# Altium PCB Placa-Mae-PCB1.PcbDoc
Units mm, origin at the board's own origin, x right, y up, seen from the top; angles counter-clockwise.
Board outline 87 x 113 mm, 2 copper layers (Top Layer, Bottom Layer); 35 components, 32 nets, 161 pads, 0 vias.
Unrouted connection lines stored in the file: 13.
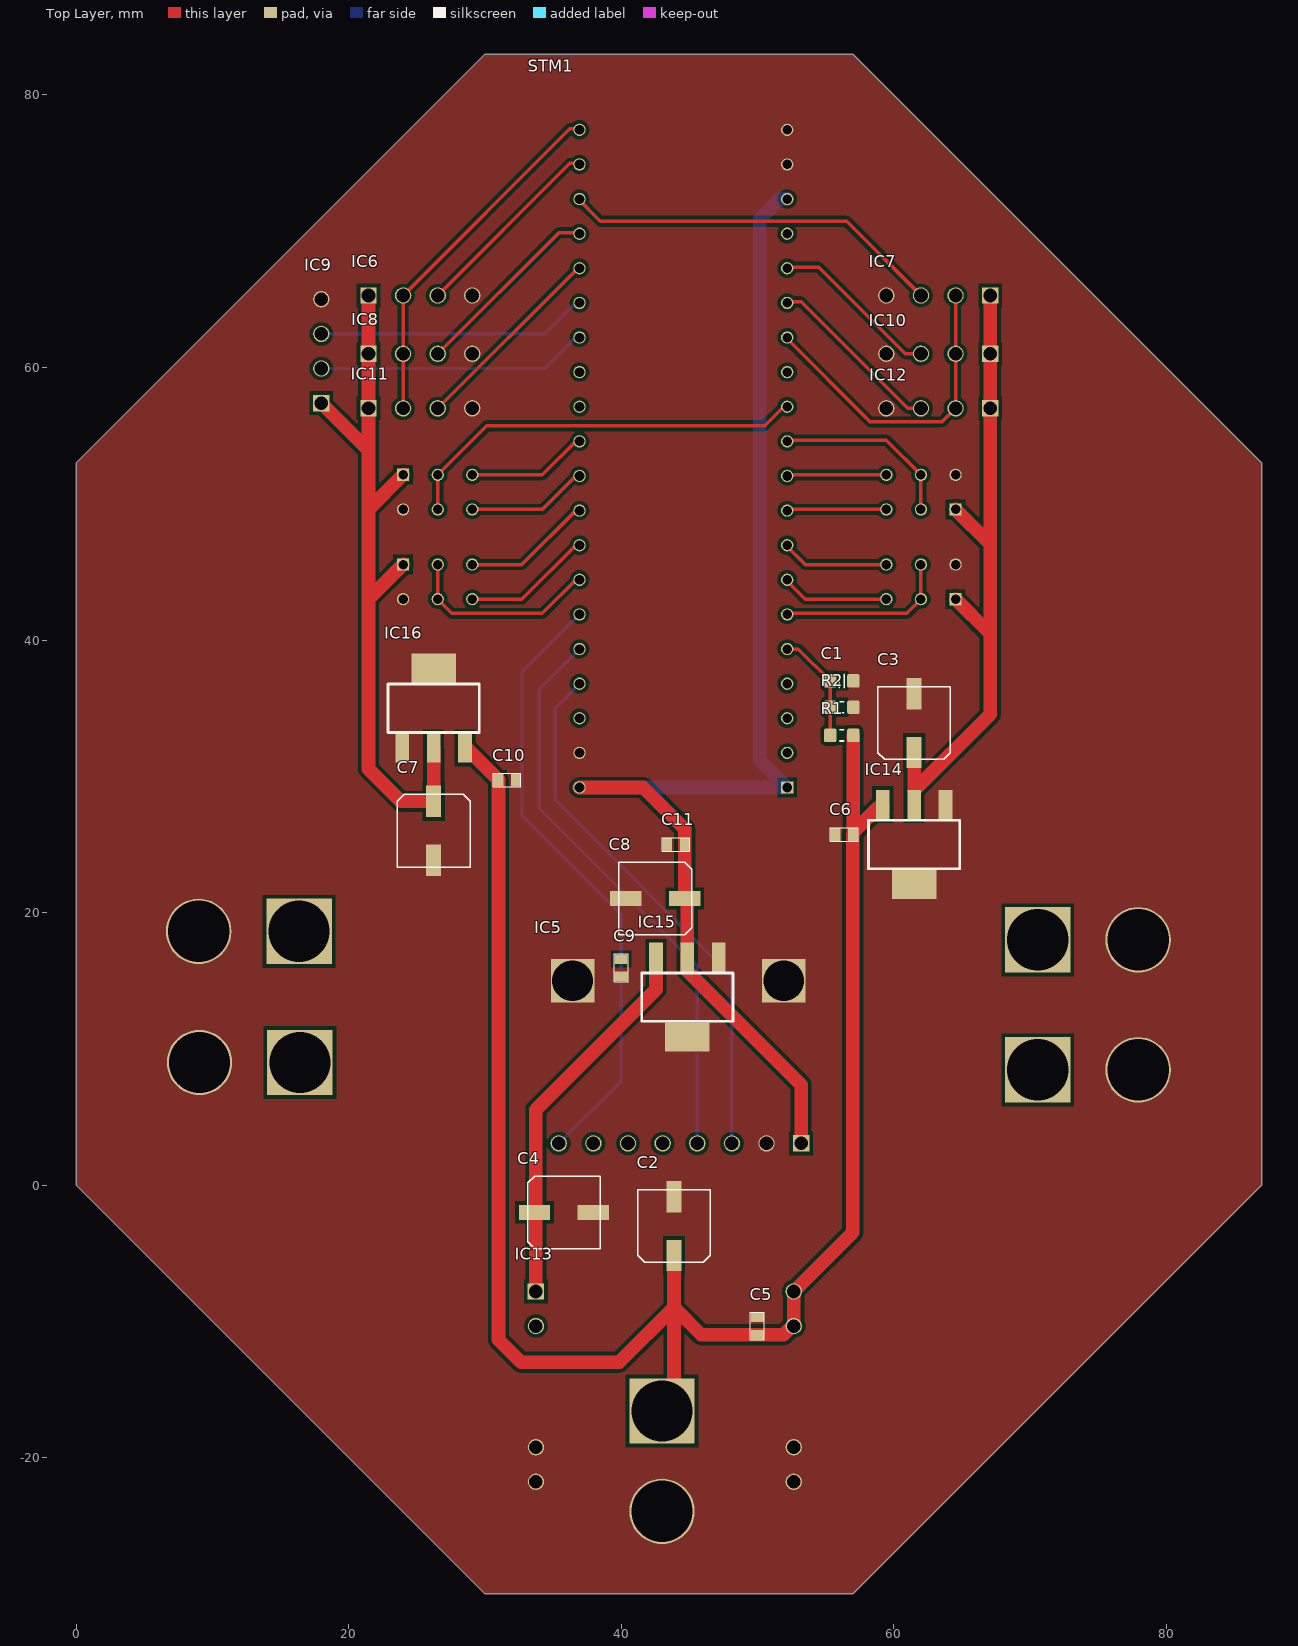
[diagram p0: Top Layer view]
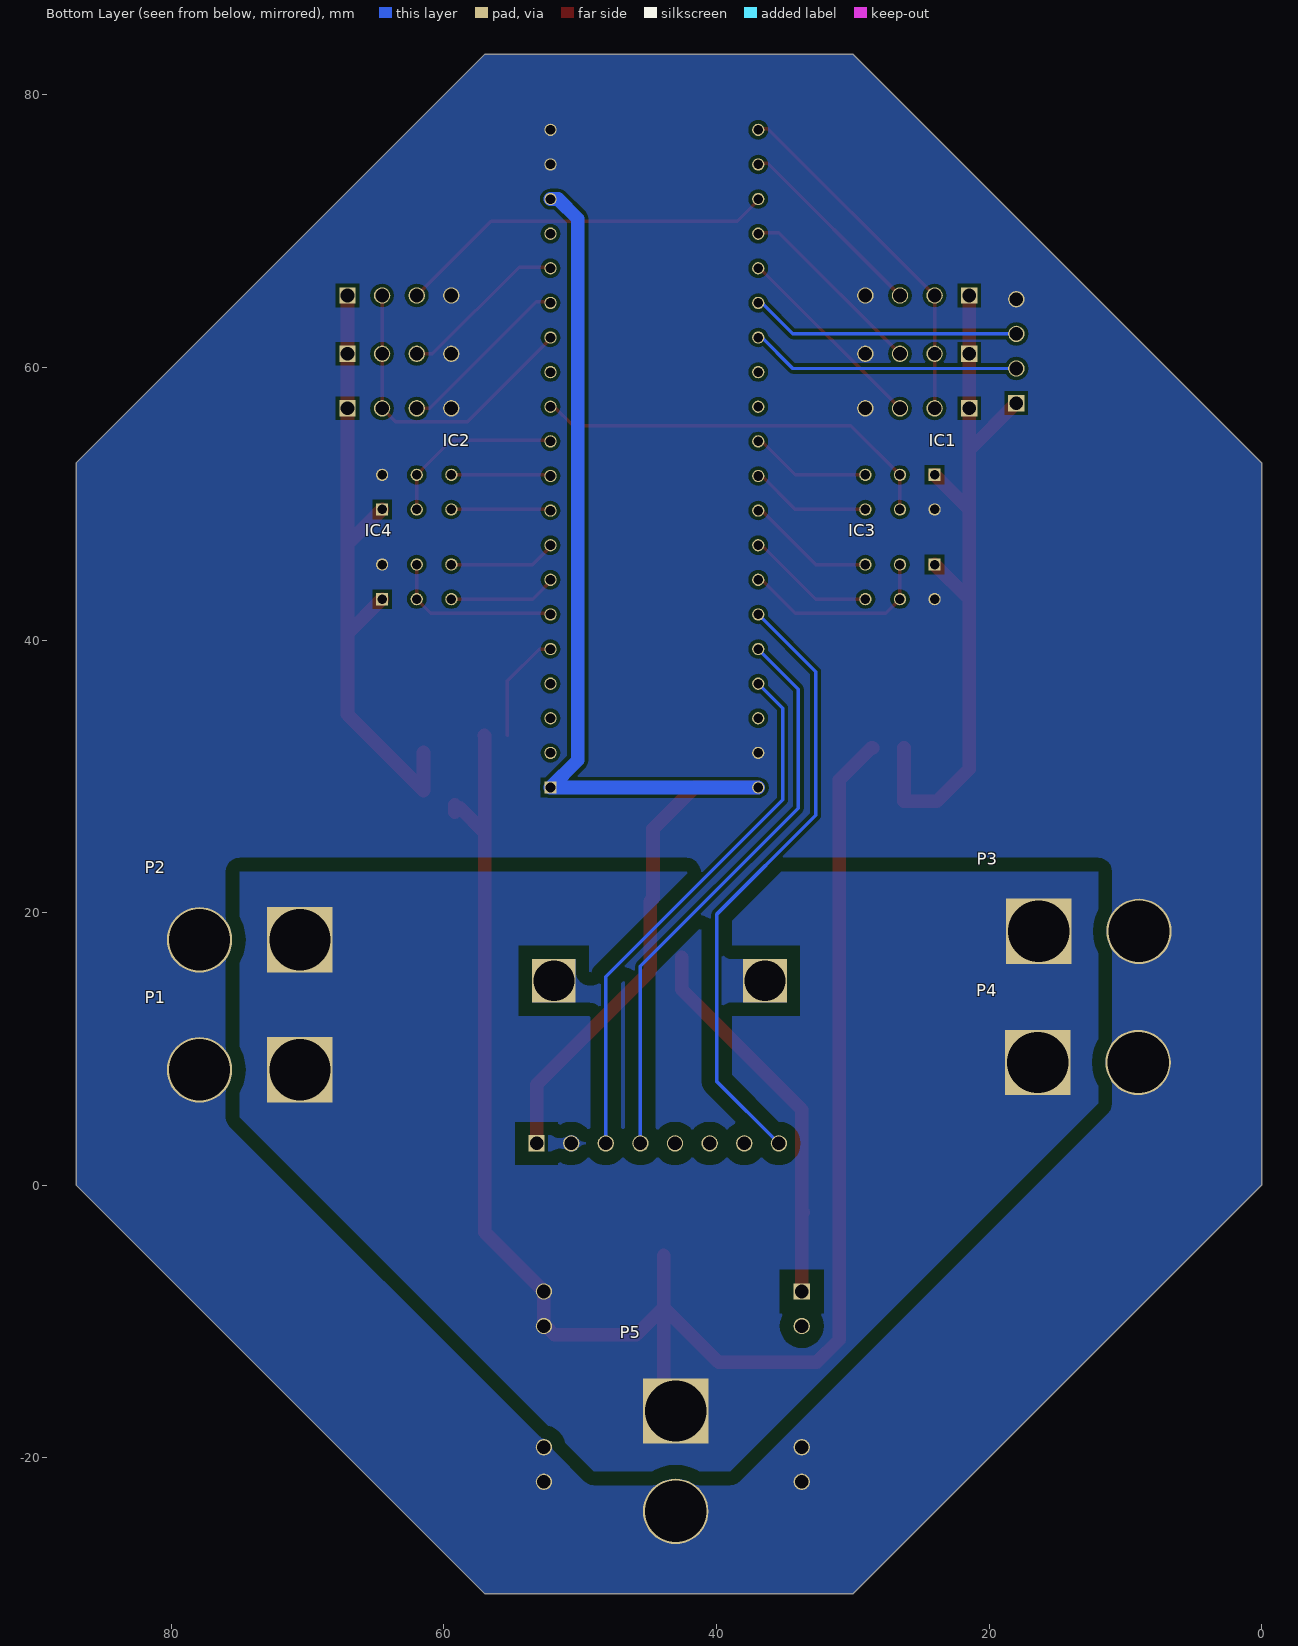
[diagram p1: Bottom Layer view, seen from below]
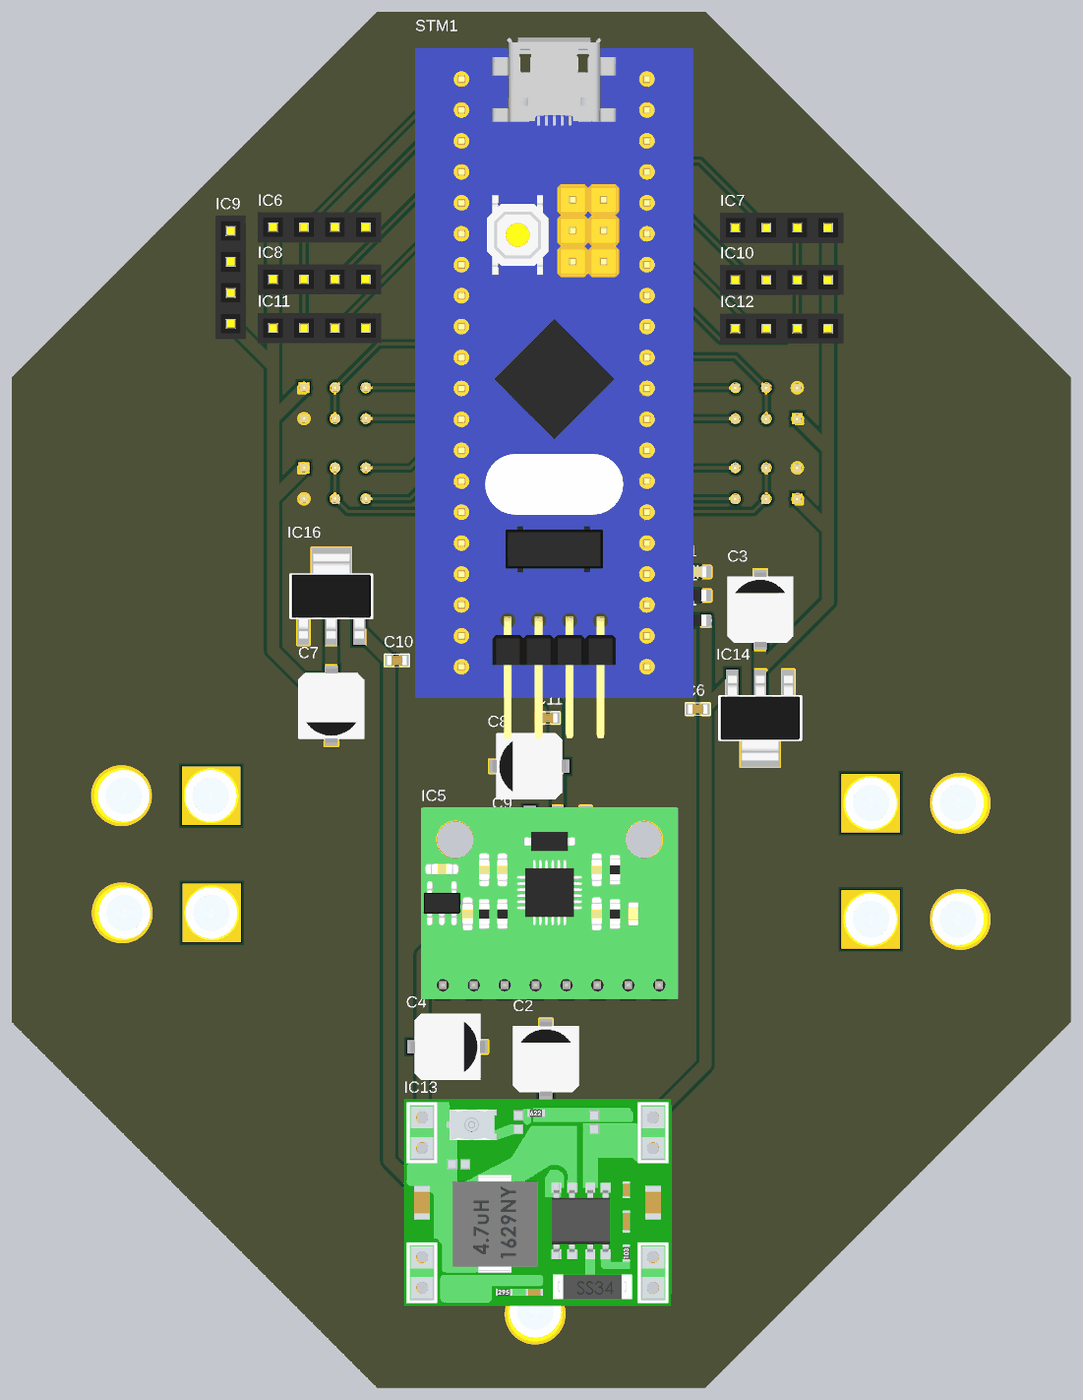
[diagram p2: 3D render of the assembled board from above, using the file's embedded part models]
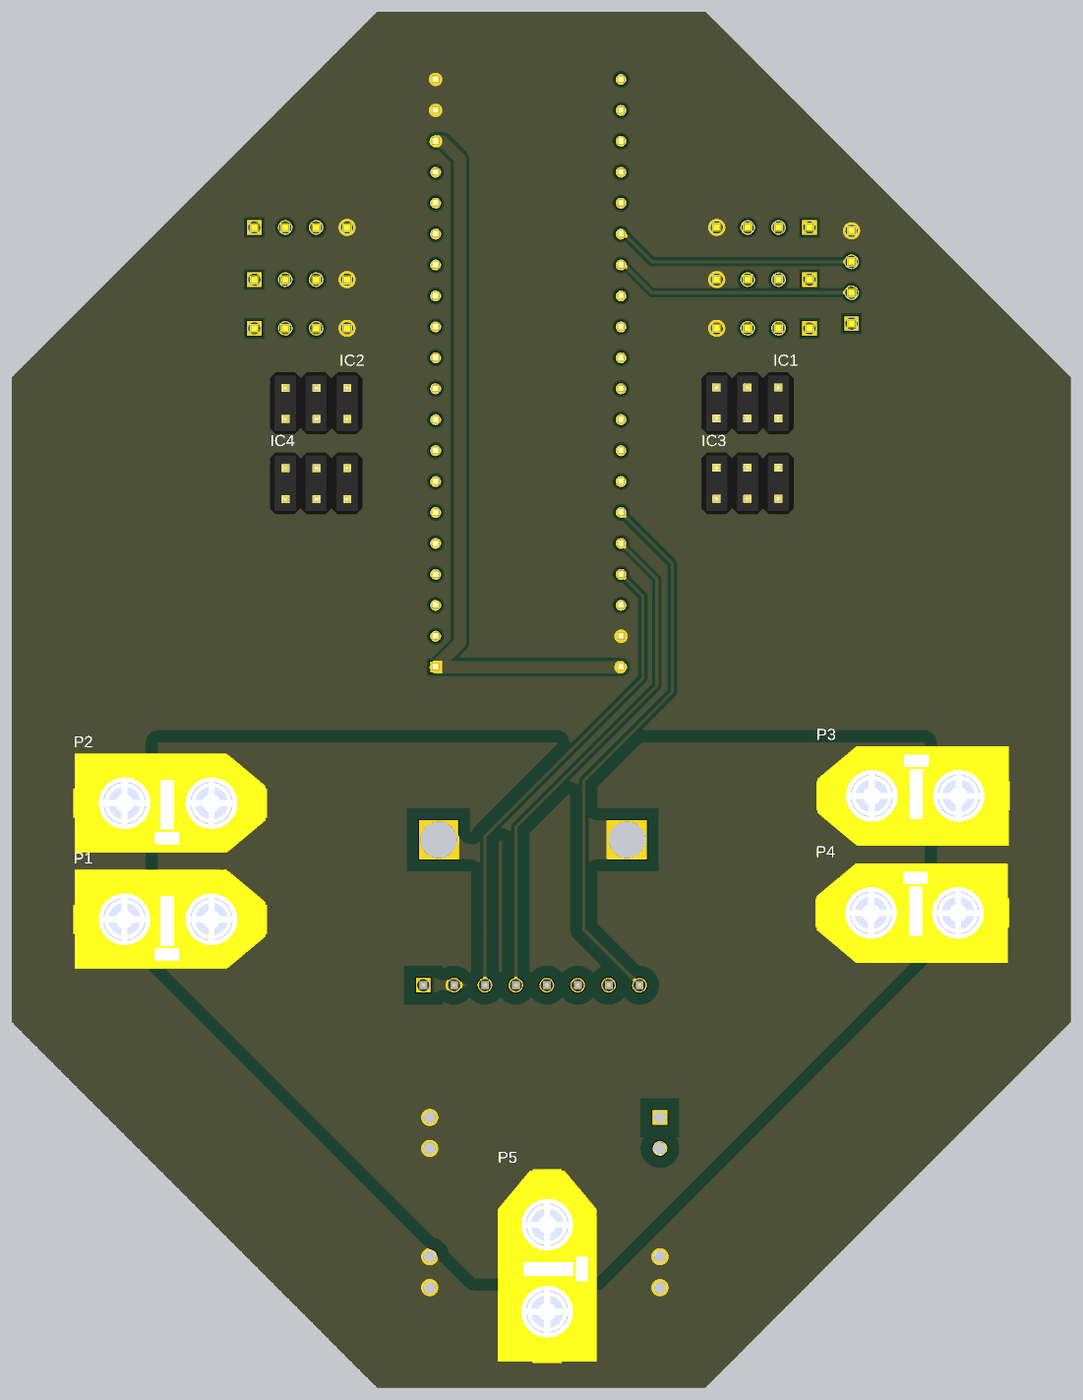
[diagram p3: 3D render of the assembled board from below, using the file's embedded part models]

## Layer stack, top to bottom
Top Solder: solder mask 0.0102, Solder Resist, Dk 3.5
Top Layer: signal copper 0.0356
Dielectric 1: dielectric 0.32, FR-4, Dk 4.8
Bottom Layer: signal copper 0.0356
Bottom Solder: solder mask 0.0102, Solder Resist, Dk 3.5

## Board outline
30,-30 0,0 0,5 0,53 30,83 57,83 87,53 87,5 87,1 87,0 57,-30 53,-30 35,-30

## Design rules (kind name [scope] priority, off if disabled: settings)
Clearance POWER_Clearance [InNet('+12') And OnLayer('Bottom Layer')] p1: gap=1 ignorepadtopadclearanceinfootprint=FALSE
Clearance [All] p2: gap=0.254 ignorepadtopadclearanceinfootprint=FALSE except(0: Arc-Hole Track-Hole SMDPad-Hole THPad-Hole Via-Hole Fill-Hole Poly-Hole Region-Hole Text-Hole)
PlaneConnect [All] p1: planeconnectstyle=Direct reliefexpansion=0.508 reliefentries=4 reliefconductorwidth=0.254 reliefairgap=0.254
PolygonConnect [All] p1: connectstyle=Direct reliefconductorwidth=0.254 reliefentries=4 polygonreliefangle="90 Angle" airgapwidth=0.254
RoutingVias [All] p1: holewidth=0.711 width=1.27 viastyle="Through Hole" minholewidth=0.711 minwidth=1.27 maxholewidth=0.711 maxwidth=1.27
SolderMaskExpansion [All] p1: expansion=0.102
Width [All] p1: maxlimit=1 minlimit=0.254 preferedwidth=0.254
29 further rules are at their usual default settings.

## Classes and differential pairs
polygon class POWER: VBAT_BOT
component class Power: C3 C4 C5 C6 C7 C8 C9 C10 C11 IC13 IC14 IC15 IC16
component class Placa-Mae-Sch1: C1 C2 IC1 IC2 IC3 IC4 IC5 IC6 IC7 IC8 IC9 IC10 IC11 IC12 P1 P2 P3 P4 P5 R1 R2 STM1

## Components (designator, comment, footprint, x,y, rotation, side; value= is the part's Value field where it differs from the comment)
C1 "1µF" CAPC1608X90N 56.191,37 r0 top
C2 "10uF" "CAP ALUM 5X5" 43.878,-3 r90 top
C3 "10uF" "CAP ALUM 5X5" 61.498,33.902 r90 top
C4 "10uF" "CAP ALUM 5X5" 35.807,-2 r0 top
C5 "100nF" "CAP CER 0603" 50,-10.341 r270 top
C6 "100nF" "CAP CER 0603" 56.365,25.729 r0 top
C7 "10uF" "CAP ALUM 5X5" 26.246,26 r270 top
C8 "10uF" "CAP ALUM 5X5" 42.507,21.035 r180 top
C9 "100nF" "CAP CER 0603" 40,15.956 r90 top
C10 "100nF" "CAP CER 0603" 31.635,29.73 r180 top
C11 "100nF" "CAP CER 0603" 44.031,25 r0 top
IC1 "BTS7960-Sinais" "HEADER 3X2 M" 24,52.12 r0 bottom
IC2 "BTS7960-Sinais" "HEADER 3X2 M" 64.54,49.58 r180 bottom
IC3 "BTS7960-Sinais" "HEADER 3X2 M" 24,45.54 r0 bottom
IC4 "BTS7960-Sinais" "HEADER 3X2 M" 64.54,43 r180 bottom
IC5 "MPU6050-IMU" MPU6050-IMU 53.206,3.062 r180 top
IC6 "HC-SR04" "HEADER 1X4 F" 25.651,63.883 r270 top
IC7 "HC-SR04" "HEADER 1X4 F" 62.889,66.677 r90 top
IC8 "HC-SR04" "HEADER 1X4 F" 25.651,59.603 r270 top
IC9 "HC-SR04" "HEADER 1X4 F" 19.397,61.575 r0 top
IC10 "HC-SR04" "HEADER 1X4 F" 62.889,62.397 r90 top
IC11 "HC-SR04" "HEADER 1X4 F" 25.651,55.603 r270 top
IC12 "HC-SR04" "HEADER 1X4 F" 62.889,58.397 r90 top
IC13 "MP1584" MP1584 42,-14.278 r0 top
IC14 "AMS1117" SOT-223 61.498,25 r270 top
IC15 "LD1117S33CTR" SOT-223 44.859,13.795 r270 top
IC16 "AMS1117" SOT-223 26.246,35 r90 top
P1 "HEADER-BTS7960-POT" XT60-MALE 74,8.46 r0 bottom
P2 "HEADER-BTS7960-POT" XT60-MALE 74,18 r0 bottom
P3 "HEADER-BTS7960-POT" XT60-MALE 12.937,18.62 r180 bottom
P4 "HEADER-BTS7960-POT" XT60-MALE 13,9 r180 bottom
P5 "HEADER-BAT" XT60-MALE 43,-20 r270 bottom
R1 "10k" RESC1608X55N 56.191,33.002 r0 top
R2 "3k6" RESC1608X55N 56.191,35.061 r180 top
STM1 "BLUEPILL STM32F103" STM32-BLUEPILL 52.184,29.177 r90 top

## Footprints (in the part's own frame and the unit in brackets; to place one, negate y for a bottom-side part, rotate by r counter-clockwise, add the part's x,y. Pads: shape width x height; smd on the part's side, far side on the other; paste and mask are expansions set on the pad)
"CAP ALUM 5X5" [mm]
  rect 2.3x1.1 smd: 1(-2.159,0) 2(2.159,0)
  silkscreen extent -2.67,-2.67 2.67,2.67, body extent -3.05,-2.67 3.05,2.67, height 5.52
"CAP CER 0603" [mm]
  rect 0.7x0.95 smd: 1(-0.635,0) 2(0.635,0)
  silkscreen extent -1.02,-0.51 1.02,0.51, body extent -0.8,-0.4 0.8,0.4, height 0.9
CAPC1608X90N [mm] "Chip Capacitor, Body 1.6x0.8mm, EIA 0603, IPC Medium Density"
  round 0.254 on Mech15: 0(0,0)
  rrect25% 0.9x1 smd: 1(-0.85,0) 2(0.85,0)
  Top Layer pour cut-out: -0.6,0.5 -0.4,0.7 0.4,0.7 0.6,0.5 0.6,-0.5 0.4,-0.7 -0.4,-0.7 -0.6,-0.5
  silkscreen extent -0.18,-0.48 0.18,0.48, body extent -0.85,-0.45 0.85,0.45, height 0.89
"HEADER 1X4 F" [mm]
  rect 1.2x1.2 hole 1: 1(-1.397,-4.191)
  round 1.2 hole 1: 2(-1.397,-1.651) 3(-1.397,0.889) 4(-1.397,3.429)
  body extent -2.67,-5.46 -0.17,4.7, height 8.4
"HEADER 3X2 M" [mm]
  rect 0.9x0.9 hole 0.7: 1(0,0)
  round 0.9 hole 0.7: 2(2.54,0) 3(5.08,0) 4(5.08,2.54) 5(2.54,2.54) 6(0,2.54)
  body extent -1.27,-1.27 6.35,3.81, height 9.2
MP1584 [mm]
  round 1.2 hole 1: 1(-8.255,3.937) 2(10.668,3.937) 2(10.668,6.477) 3(-8.255,-7.493) 3(-8.255,-4.953) 4(10.668,-7.493) 4(10.668,-4.953)
  rect 1.2x1.2 hole 1: 1(-8.255,6.477)
  body extent -9.81,-9.02 12.19,7.98, height 14.1
MPU6050-IMU [mm]
  rect 1.2x1.2 hole 1: 1(0,0)
  rect 3.2x3.2 hole 3: 2(1.27,-11.938) 2(16.764,-11.938)
  round 1.2 hole 1: 2(2.54,0) 3(5.08,0) 4(7.62,0) 5(10.16,0) 6(12.7,0) 7(15.24,0) 8(17.78,0)
  body extent -1.54,-14.6 19.57,1.27, height 10.94
RESC1608X55N [mm] "Chip Resistor, Body 1.6x0.8mm, EIA 0603, IPC Medium Density"
  round 0.254 on Mech15: 0(0,0)
  rrect25% 0.9x1 smd: 1(-0.85,0) 2(0.85,0)
  Top Layer pour cut-out: -0.6,0.5 -0.4,0.7 0.4,0.7 0.6,0.5 0.6,-0.5 0.4,-0.7 -0.4,-0.7 -0.6,-0.5
  silkscreen extent -0.15,-0.41 0.15,0.41, body extent -0.87,-0.47 0.88,0.48, height 0.54
SOT-223 [mm]
  rect 2.15x1 smd: 1(-2.925,2.3) 2(-2.925,0) 3(-2.925,-2.3)
  rect 2.15x3.25 smd: 4(2.925,0)
  silkscreen extent -1.78,-3.35 1.78,3.35, body extent -3.48,-3.25 3.48,3.25, height 1.65
STM32-BLUEPILL [mm]
  rect 0.9x0.9 hole 0.7: 1(0,0)
  round 0.9 hole 0.7: 2(2.54,0) 3(5.08,0) 4(7.62,0) 5(10.16,0) 6(12.7,0) 7(15.24,0) 8(17.78,0) 9(20.32,0) 10(22.86,0) 11(25.4,0) 12(27.94,0) 13(30.48,0) 14(33.02,0) 15(35.56,0) 16(38.1,0) 17(40.64,0) 18(43.18,0) 19(45.72,0) 20(48.26,0) 21(48.26,15.24) 22(45.72,15.24) 23(43.18,15.24) 24(40.64,15.24) 25(38.1,15.24) 26(35.56,15.24) 27(33.02,15.24) 28(30.48,15.24) 29(27.94,15.24) 30(25.4,15.24) 31(22.86,15.24) 32(20.32,15.24) 33(17.78,15.24) 34(15.24,15.24) 35(12.7,15.24) 36(10.16,15.24) 37(7.62,15.24) 38(5.08,15.24) 39(2.54,15.24) 40(0,15.24)
  body extent -5.84,-3.81 51.72,19.05, height 14.85
XT60-MALE [mm]
  rect 4.8x4.8 hole 4.5: 1(-3.429,0)
  round 4.8 hole 4.5: 2(3.937,0)
  body extent -7.95,-4.09 7.95,4.06, height 16.2

## Part data
C1: library part GCJ188R71C104KA01D, "CAP CER 0.1UF 16V X7R 0603", Digi-Key Part Number=490-5796-1-ND, Manufacturer="Murata Electronics North America", Operating Temperature="-55°C ~ 125°C", Package / Case="0603 (1608 Metric)", Ratings=AEC-Q200, Temperature Coefficient=X7R, Tolerance=±10%, Voltage=16V, @ qty=0, Applications="Automotive, Boardflex Sensitive", Datasheets=http://www.murata.com/~/media/webrenewal/support/library/catalog/products/capacitor/mlcc/c03e.ashx, Factory Stock=0, Features="Soft Termination", Height - Seated (Max)=-, Image=//media.digikey.com/Renders/Murata%20Renders/0603%28LQG18%29.jpg, Lead Spacing=-, Lead Style=-, Minimum Quantity=1, Mounting Type="Surface Mount, MLCC", Packaging="Cut Tape (CT)", Part Number=GCJ188R71C104KA01D, Part Status=Active, Quantity Available=22473, Series=GCJ, Size / Dimension="0.063\" L x 0.031\" W (1.60mm x 0.80mm)", Thickness (Max)="0.035\" (0.90mm)", Unit Price (USD)=0.21
C2 C3 C4 C7 C8: library part "CAP ALUM 25V 10uF", "Aluminum Electrolytic Capacitors - SMD 25volts 10uF 5x5.4 20%", Mfr=Nichion, Mfr Nr=UWX1E100MCL1GB, Voltage Rating=25V, Dimensions=5x5mm, Series=UWX, Type="Surface Mount Aluminum Electrolytic Capacitor"
C5 C6 C9 C10 C11: library part "CAP CER 0603 25V 100nF", "Multilayer Ceramic Capacitors MLCC - SMD/SMT 25V 0.1uF 0603 Y5V -20/+80%", Mfr=KEMET, Mfr Nr=C0603C104Z3VACTU, Voltage Rating=25V, Dimensions="0603 (1608 metric)", Series="SMD Comm Y5V", Type="Ceramic Capacitor"
IC1 IC2 IC3 IC4: "Conector com os sinais de controle de velocidade do driver BTS7960"
IC6 IC7 IC8 IC9 IC10 IC11 IC12: "Sensor Ultrassom"
IC14 IC16: "LDO Voltage Regulators 5V 1A", Mfr=STMicroelectronics, Package=SOT-223-3, Series=LD1117
IC15: "LDO Voltage Regulators 3.3V 0.8A Positive", Mfr=STMicroelectronics, Package=SOT-223-3, Series=LD1117
R1 R2: library part "RES 1K 0402", "RES SMD 20 OHM 1% 1/16W 0603"
STM1: library part STM32-BLUEPILL, "STM32 Blue Pill Development Module"

## Nets (pads, with @x,y where several pads share a name; then routed paths per layer and width w, separated by ;. In a path a pad name is that pad's centre, name@x,y a point inside that pad or via, vN(x,y) a via of type N, cw(c..) or ccw(c..) an arc to the next point about the centre after c; other vN are vias at no path point)
+3V3: C8.1 C11.2 IC5.1 IC15.2 STM1.1 STM1.18 STM1.40 | length 96
  Top Layer w1: STM1.40 41.617,29.177 44.666,26.128 C11.2 C8.1 44.859,20.842 IC15.2 44.859,15.714 53.206,7.368 IC5.1
  Bottom Layer w1: STM1.40 STM1.1 50.184,31.177 50.184,70.917 51.624,72.357 STM1.18
+5: C4.1 C9.2 IC13.1 IC15.3 | length 28.2
  Top Layer w1: C4.1 C4.1@33.711,-2 ; IC13.1@33.745,-7.801 33.745,-3.154 33.745,-2 33.745,5.543 42.559,14.357 IC15.3
+5_1: C7.1 IC1.1 IC3.1 IC6.1 IC8.1 IC9.1 IC11.1 IC16.2 | length 56.5
  Top Layer w1: IC9.1 21.384,54 21.46,54 ; IC6.1 IC8.1 IC11.1 21.46,54 ; IC3.1 21.46,43 ; IC1.1 21.46,49.58 ; IC16.2 C7.1 23.841,28.159 21.46,30.54 21.46,43 ; 21.46,43 21.46,49.58 ; 21.46,49.58 21.46,54
+5_2: C3.1 IC2.1 IC4.1 IC7.1 IC10.1 IC12.1 IC14.2 | length 48.6
  Top Layer w1: C3.1 61.498,28.958 67.08,34.54 67.08,40.46 ; IC4.1 67.08,40.46 ; IC2.1 67.08,47.04 ; IC7.1 IC10.1 IC12.1 67.08,47.04 ; 67.08,40.46 67.08,47.04
+12: C2.1 C5.2 C6.2 C10.2 IC13.2 IC14.3 IC16.3 P1.1 P2.1 P3.1 P4.1 P5.1 R1.2 | length 130.2
  Top Layer w1: IC16.3 28.655,32.075 C10.2 31,25 31,-8 31,-11.341 32.659,-13 39.848,-13 43.878,-8.971 ; P5.1 43.878,-15.693 43.878,-8.971 ; C2.1 43.878,-8.971 ; R1.2 57.021,32.982 C6.2@57.021,25.875 ; IC14.3 59.198,27.35 58.847,27.701 C6.2@57.021,25.875 ; 43.878,-8.971 45.883,-10.976 C5.2 51.916,-10.976 52.551,-10.341 52.668,-10.341 52.668,-7.801 57,-3.469 C6.2 57.021,25.75 C6.2@57.021,25.875
BAT_TENSAO: C1.1 R1.1 R2.2 STM1.5 | length 8.1
  Top Layer w0.254: STM1.5 53.004,39.337 C1.1 R2.2 R1.1
ECHO_1: IC6.3 STM1.22 | length 14.2
  Top Layer w0.254: IC6.3 36.24,74.98 STM1.22@36.76,74.98
ECHO_2: IC7.3 STM1.23 | length 28.2
  Top Layer w0.254: STM1.23@36.76,72.44 38.469,70.731 56.549,70.731 IC7.3
ECHO_3: IC8.3 STM1.24 | length 13.9
  Top Layer w0.254: IC8.3 35.44,69.9 STM1.24@36.76,69.9
ECHO_4: IC10.3 STM1.16 | length 12.6
  Top Layer w0.254: STM1.16@52,67.36 54.487,67.36 60.847,61 IC10.3
ECHO_5: IC11.3 STM1.25 | length 14.6
  Top Layer w0.254: IC11.3 36.76,67.22 STM1.25@36.76,67.36
ECHO_6: IC12.3 STM1.15 | length 13.2
  Top Layer w0.254: STM1.15@52,64.82 53.215,64.82 61.035,57 IC12.3
GND: C1.2 C2.2 C3.2 C4.2 C5.1 C6.1 C7.2 C8.2 C9.1 C10.1 C11.1 IC1.6 IC2.6 IC3.6 IC4.6 IC5.2 IC6.4 IC7.4 IC8.4 IC9.4 IC10.4 IC11.4 IC12.4 IC13.3 IC13.4 IC14.1 IC14.4 IC15.1 IC15.4 IC16.1 IC16.4 P1.2 P2.2 P3.2 P4.2 P5.2 R2.1 STM1.19 STM1.20 STM1.39
IMU_INT: IC5.8 STM1.35 | length 45.5
  Bottom Layer w0.254: IC5.8 40,7.636 40,19.856 32.725,27.131 32.725,37.659 STM1.35
IMU_SCL: IC5.3 STM1.37 | length 39.9
  Bottom Layer w0.254: STM1.37 35.151,35.004 35.151,28.275 48.126,15.3 IC5.3
IMU_SDA: IC5.4 STM1.36 | length 42.3
  Bottom Layer w0.254: STM1.36 34,36.393 34,27.649 45.586,16.063 IC5.4
LPWM_1: IC1.3 STM1.30 | length 8.7
  Top Layer w0.254: IC1.3 34.22,52.12 STM1.30@36.76,54.66
LPWM_2: IC2.3 STM1.9 | length 7.5
  Top Layer w0.254: STM1.9@52,49.58 IC2.3
LPWM_3: IC3.3 STM1.32 | length 9.4
  Top Layer w0.254: IC3.3 32.72,45.54 STM1.32@36.76,49.58
LPWM_4: IC4.3 STM1.7 | length 8.1
  Top Layer w0.254: STM1.7@52,44.5 53.5,43 IC4.3
PWM_1: IC1.2 IC1.5 STM1.12 | length 30.1
  Top Layer w0.254: IC1.5 IC1.2 30.145,55.725 50.525,55.725 STM1.12@52,57.2
PWM_2: IC2.2 IC2.5 STM1.11 | length 13.6
  Top Layer w0.254: STM1.11@52,54.66 59.46,54.66 IC2.5 IC2.2
PWM_3: IC3.2 IC3.5 STM1.34 | length 14.2
  Top Layer w0.254: IC3.2 IC3.5 27.58,41.96 34.22,41.96 STM1.34@36.76,44.5
PWM_4: IC4.2 IC4.5 STM1.6 | length 13
  Top Layer w0.254: STM1.6@52,41.96 60.96,41.96 IC4.2 IC4.5
RPWM_1: IC1.4 STM1.31 | length 8.7
  Top Layer w0.254: IC1.4 34.22,49.58 STM1.31@36.76,52.12
RPWM_2: IC2.4 STM1.10 | length 7.5
  Top Layer w0.254: STM1.10@52,52.12 IC2.4
RPWM_3: IC3.4 STM1.33 | length 9.4
  Top Layer w0.254: IC3.4 32.72,43 STM1.33@36.76,47.04
RPWM_4: IC4.4 STM1.8 | length 8.1
  Top Layer w0.254: STM1.8@52,47.04 53.5,45.54 IC4.4
RX1: IC9.2 STM1.27 | length 19.7
  Bottom Layer w0.254: IC9.2 34.404,59.924 STM1.27@36.76,62.28
TRIG_DIR: IC7.2 IC10.2 IC12.2 STM1.14 | length 23.8
  Top Layer w0.254: STM1.14@52,62.28 58.28,56 63.54,56 IC12.2 IC10.2 IC7.2
TRIG_ESQ: IC6.2 IC8.2 IC11.2 STM1.21 | length 26.1
  Top Layer w0.254: IC11.2 IC8.2 IC6.2 36.24,77.52 STM1.21@36.76,77.52
TX1: IC9.3 STM1.26 | length 19.7
  Bottom Layer w0.254: IC9.3 34.404,62.464 STM1.26@36.76,64.82
pads on no net: C1.0 IC5.5 IC5.6 IC5.7 R1.0 R2.0 STM1.2 STM1.3 STM1.4 STM1.13 STM1.17 STM1.28 STM1.29 STM1.38

## Polygon pours and split planes (outlines as drawn)
GND on Bottom Layer "GND_BOT" (solid, pour order 10): 0,0 30,-30 57,-30 87,0 87,53 57,83 30,83 0,53
+12 on Bottom Layer "VBAT_BOT" (solid, pour order 9): 12,6 39,-21 49,-21 75,5 75,23 12,23
GND on Top Layer "GND_TOP" (solid, pour order 8): 0,53 0,0 30,-30 57,-30 87,0 87,53 57,83 30,83